# Altium PCB PCB3.PcbDoc (part 2 of 2)
Units mm, origin at the board's own origin, x right, y up, seen from the top; angles counter-clockwise.
Board outline 110 x 86 mm, 4 copper layers (Top Layer, Signal Layer 1, Signal Layer 2, Bottom Layer), stack 1.466 mm thick; 201 components, 102 nets, 1236 pads, 354 vias.
Unrouted connection lines stored in the file: 1.
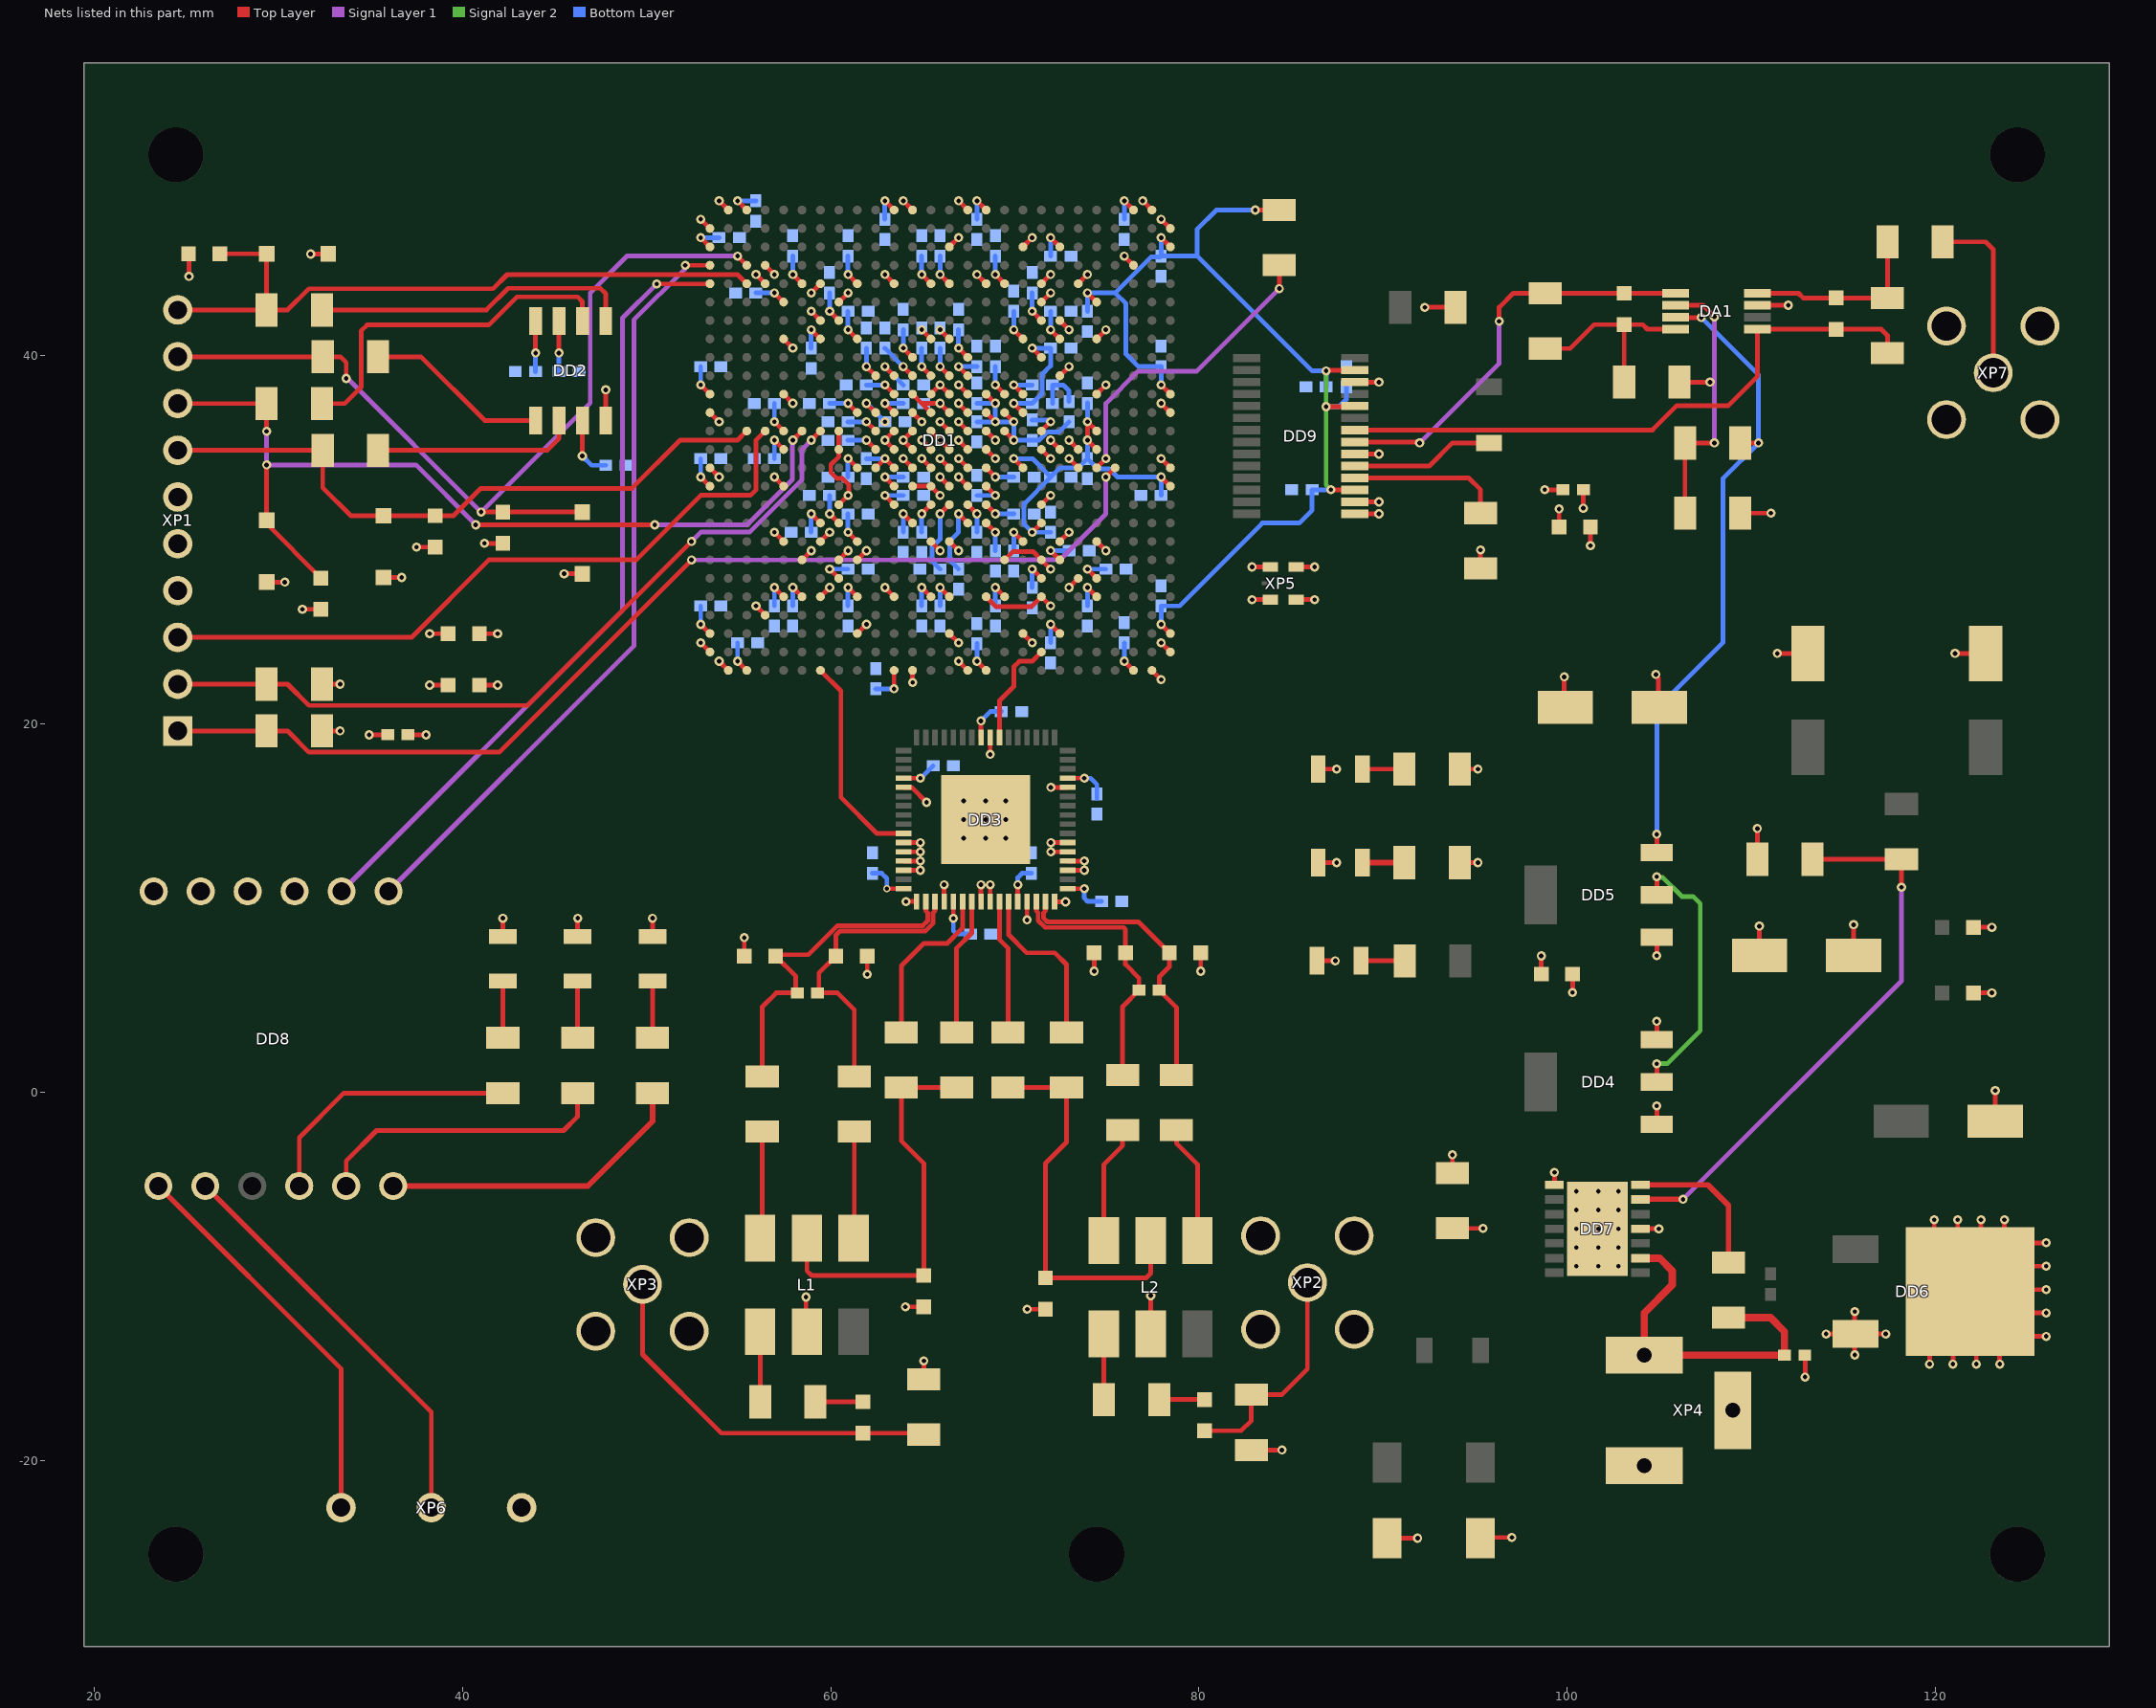
[diagram p4: the nets of this part, all layers, seen from the top]

## Via types
v1: diameter 0.5, hole 0.25, Top Layer to Bottom Layer, 352 vias
v2: diameter 0.4, hole 0.25, Top Layer to Bottom Layer, 2 vias

## Nets (pads, with @x,y where several pads share a name; then routed paths per layer and width w, separated by ;. In a path a pad name is that pad's centre, name@x,y a point inside that pad or via, vN(x,y) a via of type N, cw(c..) or ccw(c..) an arc to the next point about the centre after c; other vN are vias at no path point) (continued)
GND: C1.2 C2.2 C3.2 C4.2 C5.2 C6.2 C7.2 C8.2 C9.2 C10.2 C11.2 C12.2 C13.2 C14.2 C15.2 C16.2 C17.2 C18.2 C19.2 C20.2 C21.2 C22.2 C23.2 C24.2 C25.2 C26.2 C27.2 C28.2 C29.2 C30.2 C31.2 C32.2 C33.2 C34.2 C35.2 C36.2 C37.2 C38.2 C39.2 C40.2 C41.2 C42.2 C43.2 C44.2 C45.2 C46.2 C47.2 C48.2 C49.2 C50.2 C51.2 C52.2 C53.2 C54.2 C55.2 C56.2 C57.2 C58.2 C59.2 C60.2 C61.2 C62.2 C63.2 C64.2 C65.2 C66.2 C67.2 C68.2 C69.2 C70.2 C71.2 C72.2 C73.2 C74.2 C75.2 C76.2 C77.2 C78.2 C79.2 C80.2 C81.2 C82.2 C83.2 C84.2 C85.2 C86.2 C87.2 C88.2 C89.2 C90.2 C91.2 C92.2 C93.2 C94.2 C95.2 C96.2 C99.2 C100.2 C101.2 C102.2 C103.2 C104.2 C105.2 C106.2 C107.2 C108.1 C109.2 C110.1 C111.2 C114.2 C115.2 C116.2 C118.2 C119.2 C120.2 C121.2 C122.2 C123.2 C125.2 C126.2 C127.2 C128.2 C130.2 C135.2 DA1.7 DD1.A2 DD1.A12 DD1.A15 DD1.A25 DD1.AA21 DD1.AB7 DD1.AB11 DD1.AB16 DD1.AB19 DD1.AC4 DD1.AD9 DD1.AD14 DD1.AD18 DD1.AE1 DD1.AE26 DD1.AF2 DD1.AF12 DD1.AF15 DD1.AF25 DD1.B1 DD1.B26 DD1.C14 DD1.C18 DD1.D4 DD1.D24 DD1.E4 DD1.E7 DD1.E11 DD1.E16 DD1.E19 DD1.E21 DD1.F8 DD1.F19 DD1.G7 DD1.G20 DD1.H5 DD1.H13 DD1.H14 DD1.H22 DD1.K20 DD1.L5 DD1.L12 DD1.L13 DD1.L14 DD1.L15 DD1.L22 DD1.M1 DD1.M12 DD1.M13 DD1.M14 DD1.M15 DD1.M26 DD1.N8 DD1.N11 DD1.N12 DD1.N13 DD1.N14 DD1.N15 DD1.N16 DD1.N19 DD1.P8 DD1.P11 DD1.P12 DD1.P13 DD1.P14 DD1.P15 DD1.P16 DD1.P19 DD1.P20 DD1.P21 DD1.R1 DD1.R12 DD1.R13 DD1.R14 DD1.R15 DD1.R21 DD1.R26 DD1.T5 DD1.T12 DD1.T13 DD1.T14 DD1.T15 DD1.U8 DD1.U19 DD1.W5 DD1.W7 DD1.W13 DD1.W14 DD1.W20 DD1.W22 DD1.Y6 DD1.Y8 DD1.Y9 DD1.Y17 DD1.Y19 DD2.4 DD3.1 DD3.4 DD3.13 DD3.16 DD3.21 DD3.22 DD3.28 DD3.40 DD3.53 DD3.59 DD3.60 DD3.61 DD3.62 DD3.65 DD4.1 DD5.1 DD6.4 DD7.4 DD7.8 DD8.8 DD9.15 DD9.16 DD9.20 DD9.26 HL1.2 HL2.2 HL3.2 HL4.2 HL5.2 HL6.2 L1.2 L2.2 R8.1 R9.1 R20.1 R21.1 R25.1 R31.1 R33.1 R36.1 VD10.2 VD11.2 XP1.4 XP1.5 XP2.2 XP3.2 XP4.2 XP4.3 XP5.2 XP6.GND XP7.2 | length 173.5
  Top Layer w0.254: C90.2@25.128,45.529 25.153,45.505 v1(25.153,44.301) ; v1(31.314,26.225) C93.2@32.315,26.225 ; v1(34.94,19.408) C135.2@35.94,19.408 ; v1(37.512,29.605) C95.2@38.512,29.605 ; v1(38.225,22.111) C119.2@39.225,22.111 ; v1(38.225,24.905) C123.2@39.225,24.905 ; v1(41.195,29.809) C92.2@42.195,29.809 ; HL5.2@42.196,8.448 v1(42.196,9.449) ; HL4.2@46.26,8.448 v1(46.26,9.449) ; DD2.4@47.783,36.479 v1(47.783,38.145) ; HL3.2@50.324,8.448 v1(50.324,9.449) ; v1(52.94,24.408) DD1.AE1@53.44,23.908 ; v1(52.94,47.408) DD1.B1@53.44,46.908 ; DD1.R1@53.44,33.908 v1(53.94,33.408) ; DD1.M1@53.44,36.908 v1(53.94,36.408) ; v1(53.94,23.408) DD1.AF2@54.44,22.908 ; v1(53.94,48.408) DD1.A2@54.44,47.908 ; C108.1@55.305,7.395 v1(55.305,8.395) ; v1(55.94,26.408) DD1.AC4@56.44,25.908 ; v1(55.94,44.408) DD1.E4@56.44,43.908 ; DD1.D4@56.44,44.908 v1(56.94,44.408) ; v1(56.94,30.408) DD1.W5@57.44,29.908 ; v1(56.94,33.408) DD1.T5@57.44,32.908 ; DD1.L5@57.44,37.908 v1(57.94,37.408) ; DD1.H5@57.44,40.908 v1(57.94,40.408) ; DD1.Y6@58.44,28.908 v1(58.94,29.408) ; v1(58.656,-11.122) 58.656,-12.951 L1.2@58.706,-13.002 ; v1(58.94,42.408) DD1.G7@59.44,41.908 ; v1(58.94,43.408) DD1.E7@59.44,43.908 ; DD1.AB7@59.44,26.908 v1(59.94,27.408) ; DD1.W7@59.44,29.908 v1(59.94,30.408) ; DD1.Y8@60.44,28.908 v1(60.94,29.408) ; DD1.U8@60.44,31.908 v1(60.94,32.408) 60.985,32.453 60.985,32.972 60.619,33.339 60.321,33.339 60.01,33.65 60.01,34.087 60.44,34.517 DD1.P8@60.44,34.908 DD1.N8@60.44,35.908 ; DD1.F8@60.44,42.908 v1(60.94,43.408) ; DD1.AD9@61.44,24.908 v1(61.94,25.408) ; DD1.Y9@61.44,28.908 v1(61.94,29.408) ; v1(61.982,6.4) C106.2@61.982,7.4 ; v1(62.94,27.408) DD1.AB11@63.44,26.908 ; v1(62.94,44.408) DD1.E11@63.44,43.908 ; DD1.P11@63.44,34.908 v1(62.94,35.408) DD1.N11@63.44,35.908 ; v1(63.94,34.408) DD1.R12@64.44,33.908 ; v1(63.94,48.408) DD1.A12@64.44,47.908 ; DD3.62@63.96,12.056 v1(64.871,12.056) ; DD3.61@63.96,12.556 v1(64.871,12.556) ; DD3.60@63.96,13.056 v1(64.871,13.056) ; DD3.59@63.96,13.556 v1(64.871,13.556) ; DD3.53@63.96,16.556 64.396,16.556 v1(65.209,15.744) ; v1(64.056,-11.654) C110.1@65.056,-11.654 ; v1(64.091,10.356) DD3.1@64.66,10.356 ; DD1.AF12@64.44,22.908 64.444,22.904 64.444,22.257 v1(64.448,22.254) ; DD1.T12@64.44,32.908 DD1.T13@65.44,32.908 v1(65.94,32.408) ; DD1.P12@64.44,34.908 v1(63.94,35.408) DD1.N12@64.44,35.908 ; DD1.M12@64.44,36.908 v1(64.94,36.408) ; DD1.L12@64.44,37.908 64.94,37.408 ; v1(64.94,34.408) DD1.R13@65.44,33.908 ; v1(64.94,35.408) DD1.P13@65.44,34.908 ; v1(64.94,41.408) DD1.H13@65.44,40.908 ; R8.1@65.056,-15.59 v1(65.056,-14.589) ; DD1.W13@65.44,29.908 v1(65.94,29.408) ; DD1.N13@65.44,35.908 v1(65.94,35.408) DD1.P14@66.44,34.908 ; DD1.M13@65.44,36.908 64.94,37.408 ; DD1.L13@65.44,37.908 v1(65.94,38.408) DD1.L14@66.44,37.908 ; v1(65.94,33.408) DD1.T14@66.44,32.908 ; v1(65.94,34.408) DD1.R14@66.44,33.908 ; v1(65.94,36.408) DD1.N14@66.44,35.908 ; v1(65.94,41.408) DD1.H14@66.44,40.908 ; DD3.4@66.16,10.356 v1(66.16,11.267) ; DD1.AD14@66.44,24.908 v1(66.94,24.408) ; DD1.W14@66.44,29.908 v1(66.94,29.408) ; DD1.M14@66.44,36.908 v1(65.94,37.408) 64.94,37.408 ; DD1.C14@66.44,45.908 v1(66.94,46.408) ; v1(66.94,23.408) DD1.AF15@67.44,22.908 ; v1(66.94,33.408) DD1.T15@67.44,32.908 ; v1(66.94,34.408) DD1.R15@67.44,33.908 ; v1(66.94,35.408) DD1.P15@67.44,34.908 ; v1(66.94,36.408) DD1.N15@67.44,35.908 ; v1(66.94,37.408) DD1.M15@67.44,36.908 ; v1(66.94,38.408) DD1.L15@67.44,37.908 ; v1(66.94,48.408) DD1.A15@67.44,47.908 ; v1(67.94,44.408) DD1.E16@68.44,43.908 ; DD1.AB16@68.44,26.908 68.98,26.368 70.9,26.368 DD1.AB19@71.44,26.908 v1(71.94,26.408) ; DD1.P16@68.44,34.908 v1(68.94,34.408) ; DD1.N16@68.44,35.908 v1(68.94,35.408) ; v1(68.66,18.346) DD3.40@68.66,19.256 ; DD1.Y17@69.44,28.908 69.898,29.366 70.983,29.366 DD1.Y19@71.44,28.908 v1(71.94,28.408) ; DD1.AD18@70.44,24.908 v1(70.94,24.408) ; DD1.C18@70.44,45.908 v1(70.94,46.408) ; v1(70.66,9.356) DD3.13@70.66,10.356 ; v1(70.67,-11.781) C111.2@71.66,-11.781 ; DD1.U19@71.44,31.908 v1(71.94,32.408) ; DD1.P19@71.44,34.908 v1(71.94,34.408) ; DD1.N19@71.44,35.908 v1(71.94,36.408) ; DD1.F19@71.44,42.908 v1(71.94,43.408) ; DD1.E19@71.44,43.908 v1(71.94,44.408) ; v1(71.94,35.408) DD1.P20@72.44,34.908 ; v1(71.95,13.056) DD3.21@72.86,13.056 ; v1(71.95,13.556) DD3.22@72.86,13.556 ; v1(71.95,16.556) DD3.28@72.86,16.556 ; DD3.16@72.16,10.356 72.176,10.341 v1(72.753,10.341) ; DD1.W20@72.44,29.908 v1(72.94,30.408) ; DD1.K20@72.44,38.908 v1(72.94,39.408) ; DD1.G20@72.44,41.908 v1(72.94,41.408) ; v1(72.94,27.408) DD1.AA21@73.44,27.908 ; v1(72.94,34.408) DD1.R21@73.44,33.908 ; v1(72.94,35.408) DD1.P21@73.44,34.908 ; DD1.E21@73.44,43.908 v1(73.94,44.408) ; v1(74.304,6.572) C109.2@74.304,7.572 ; DD1.W22@74.44,29.908 v1(74.94,29.408) ; DD1.L22@74.44,37.908 v1(74.94,38.408) ; DD1.H22@74.44,40.908 v1(74.94,41.408) ; v1(75.94,45.408) DD1.D24@76.44,44.908 ; v1(76.94,48.408) DD1.A25@77.44,47.908 ; L2.2@77.375,-13.129 v1(77.375,-11.046) ; DD1.AF25@77.44,22.908 v1(77.94,22.408) ; v1(77.94,24.408) DD1.AE26@78.44,23.908 ; v1(77.94,34.408) DD1.R26@78.44,33.908 ; v1(77.94,37.408) DD1.M26@78.44,36.908 ; v1(77.94,47.408) DD1.B26@78.44,46.908 ; v1(80.091,6.572) C107.2@80.091,7.572 ; R9.1@82.836,-19.431 v1(84.502,-19.431) ; v1(82.877,26.749) XP5.2@83.878,26.749 ; v1(82.877,28.527) XP5.2@83.878,28.527 ; XP5.2@85.275,26.749 v1(86.276,26.749) ; XP5.2@85.275,28.527 v1(86.276,28.527) ; HL6.2@86.398,7.136 v1(87.399,7.136) ; HL2.2@86.468,12.47 v1(87.469,12.47) ; HL1.2@86.468,17.55 v1(87.469,17.55) ; DD9.15@88.458,31.41 v1(89.771,31.41) ; DD9.16@88.458,32.06 v1(89.771,32.06) ; DD9.20@88.458,34.66 v1(89.771,34.66) ; DD9.26@88.458,38.56 v1(89.771,38.56) ; VD11.2@90.202,-24.214 v1(91.868,-24.214) ; v1(92.259,42.624) R20.1@93.924,42.624 ; R21.1@93.758,-7.39 v1(95.424,-7.39) ; VD10.2@95.282,-24.214 95.318,-24.178 v1(96.984,-24.178) ; R31.1@95.282,28.448 v1(95.282,29.449) ; DD7.8@99.296,-5.026 99.296,-4.353 v1(99.299,-4.35) ; v1(100.282,5.414) C115.2@100.282,6.414 ; v1(100.864,31.718) C26.2@100.864,32.718 ; v1(101.252,29.686) C120.2@101.252,30.686 ; DD7.4@103.969,-7.414 v1(104.97,-7.414) ; v1(104.807,22.685) 104.807,22.619 104.944,22.482 C118.2@104.944,21.288 ; DD4.1@104.854,-1.742 v1(104.854,-0.741) ; v1(104.854,7.418) DD5.1@104.854,8.418 ; R36.1@106.084,38.56 v1(107.75,38.56) ; R33.1@109.386,31.448 v1(111.052,31.448) ; R25.1@110.316,12.652 v1(110.316,14.318) ; DA1.7@110.328,42.736 v1(111.994,42.736) ; v1(111.397,23.828) C125.2@113.062,23.828 ; C122.2@112.892,-14.272 112.91,-14.289 v1(112.91,-15.465) ; C121.2@115.542,7.43 v1(115.542,9.096) ; v1(119.666,-14.764) DD6.4@119.666,-13.764 ; DD6.4@119.92,-7.922 v1(119.92,-6.921) ; v1(120.936,-14.764) DD6.4@120.936,-13.764 ; v1(121.049,23.828) C126.2@122.714,23.828 ; DD6.4@121.19,-7.922 v1(121.19,-6.921) ; C116.2@122.048,5.398 v1(123.049,5.398) ; C127.2@122.048,8.954 v1(123.049,8.954) ; v1(122.206,-14.764) DD6.4@122.206,-13.764 ; DD6.4@122.46,-7.922 v1(122.46,-6.921) ; C114.2@123.232,-1.572 v1(123.232,0.094) ; v1(123.476,-14.764) DD6.4@123.476,-13.764 ; DD6.4@123.73,-7.922 v1(123.73,-6.921) ; DD6.4@125,-13.256 v1(126.001,-13.256) ; DD6.4@125,-11.986 v1(126.001,-11.986) ; DD6.4@125,-10.716 v1(126.001,-10.716) ; DD6.4@125,-9.446 v1(126.001,-9.446) ; DD6.4@125,-8.176 v1(126.001,-8.176)
  Signal Layer 1 w0.256: v1@37.497,29.62 v1(37.512,29.605)
  Bottom Layer w0.254: C21.2@70.94,36.508 71.774,36.508 71.874,36.408 v1(71.94,36.408)
  Bottom Layer w0.256: C83.2@72.04,37.408 C19.2@72.04,38.408 72.622,38.408 72.94,38.09 C30.2@72.94,37.508
  other v1: 100.489,-9.446 101.683,-9.446 102.775,-9.446 100.489,-8.43 101.683,-8.43 102.775,-8.43 100.489,-7.414 101.683,-7.414 102.775,-7.414 100.489,-6.398 101.683,-6.398 102.775,-6.398 100.489,-5.382 101.683,-5.382 102.775,-5.382 67.217,13.79 68.41,13.79 69.503,13.79 67.217,14.806 68.41,14.806 69.503,14.806 67.217,15.822 68.41,15.822 69.503,15.822
MIXA1_N: L1.6 R12.1 | length 6.3
  Top Layer w0.254: L1.6@56.202,-8.434 56.202,-7.494 56.282,-7.414 R12.1@56.282,-2.14
MIXA1_P: L1.4 R13.1 | length 6.3
  Top Layer w0.254: L1.4@61.282,-8.434 R13.1@61.282,-2.14
MIXA_N: C108.2 C112.1 DD3.2 R12.2 | length 18.6
  Top Layer w0.254: R12.2@56.282,0.86 56.282,4.64 57.042,5.4 C112.1@58.182,5.4 58.107,5.475 58.107,6.292 C108.2@57.005,7.395 57.08,7.47 58.789,7.47 60.365,9.046 65.006,9.046 65.26,9.3 65.26,9.756 65.16,9.856 DD3.2@65.16,10.356
MIXA_P: C106.1 C112.2 DD3.3 R13.2 | length 16.3
  Top Layer w0.254: R13.2@61.282,0.86 61.282,4.488 60.37,5.4 C112.2@59.282,5.4 59.357,5.475 59.357,6.475 C106.1@60.282,7.4 60.282,8.539 60.489,8.746 65.131,8.746 65.56,9.175 65.56,9.756 65.66,9.856 DD3.3@65.66,10.356
MIXB1_N: L2.6 R15.1 | length 6.4
  Top Layer w0.254: L2.6@74.835,-8.049 74.835,-3.91 75.851,-2.894 R15.1@75.851,-2.056
MIXB1_P: L2.4 R14.1 | length 6.5
  Top Layer w0.254: R14.1@78.772,-2.056 78.772,-2.767 79.915,-3.91 L2.4@79.915,-8.049
MIXB_N: C109.1 C113.1 DD3.14 R15.2 | length 14.6
  Top Layer w0.254: DD3.14@71.16,10.356 71.16,9.856 71.26,9.756 71.26,9.328 71.639,8.949 75.902,8.949 76.004,8.847 C109.1@76.004,7.572 76.005,7.571 76.005,6.94 76.74,6.205 C113.1@76.74,5.54 75.851,4.651 R15.2@75.851,0.944
MIXB_P: C107.1 C113.2 DD3.15 R14.2 | length 15.8
  Top Layer w0.254: DD3.15@71.66,10.356 71.66,9.856 71.56,9.756 71.56,9.452 71.764,9.249 76.715,9.249 C107.1@78.391,7.572 78.391,6.813 77.84,6.262 C113.2@77.84,5.54 78.772,4.608 R14.2@78.772,0.944
NetC90_1: C90.1 DD1.E3 R7.2 VD4.2 XP1.10 | length 37.5
  Top Layer w0.254: XP1.10@24.542,42.481 R7.2@29.368,42.481 ; C90.1@26.828,45.529 VD4.2@29.368,45.529 R7.2@29.368,42.481 ; DD1.E3@55.44,43.908 54.946,44.402 42.434,44.402 41.667,43.635 31.663,43.635 30.509,42.481 R7.2@29.368,42.481
NetC92_1: C92.1 DD1.D3 R4.2 VD3.2 XP1.9 | length 49.9
  Top Layer w0.254: XP1.9@24.542,39.941 R4.2@32.416,39.941 33.373,39.941 33.687,39.627 v1(33.687,38.764) ; v1(41.019,31.509) C92.1@42.195,31.509 VD3.2@46.513,31.509 ; v1(54.94,45.408) DD1.D3@55.44,44.908
  Signal Layer 1 w0.254: v1(33.687,38.764) 33.764,38.764 v1(41.019,31.509) 46.94,37.43 46.94,43.408 48.944,45.412 52.309,45.412 52.313,45.408 v1(54.94,45.408)
NetC93_1: C93.1 DD1.N6 R2.2 VD2.2 XP1.8 | length 49.3
  Top Layer w0.254: XP1.8@24.542,37.401 R2.2@29.368,37.401 v1(29.368,35.892) ; v1(29.368,34.064) VD2.2@29.368,31.051 29.368,30.872 C93.1@32.315,27.925 ; v1(40.723,30.813) v1(50.451,30.813) ; v1(57.94,35.408) DD1.N6@58.44,35.908
  Signal Layer 1 w0.254: v1(29.368,35.892) v1(29.368,34.064) 37.473,34.064 v1(40.723,30.813) ; v1(50.451,30.813) 55.455,30.813 57.919,33.277 57.919,35.387 v1(57.94,35.408)
NetC95_1: C95.1 DD1.N3 R1.2 VD1.2 XP1.7 | length 35.5
  Top Layer w0.254: XP1.7@24.542,34.861 R1.2@32.416,34.861 32.416,32.829 33.94,31.305 VD1.2@35.718,31.305 C95.1@38.512,31.305 39.513,31.305 41.003,32.795 49.207,32.795 51.823,35.411 54.943,35.411 DD1.N3@55.44,35.908
NetC97_1: C97.1 R8.2 XP3.1 | length 20.9
  Top Layer w0.254: XP3.1@49.782,-10.434 49.782,-14.238 54.056,-18.512 C97.1@61.754,-18.512 64.978,-18.512 R8.2@65.056,-18.59
NetC97_2: C97.2 R10.1 | length 2.6
  Top Layer w0.254: R10.1@59.166,-16.812 C97.2@61.754,-16.812
NetC98_1: C98.1 R9.2 XP2.1 | length 12.5
  Top Layer w0.254: C98.1@80.296,-18.385 82.279,-18.385 82.836,-17.828 R9.2@82.836,-16.431 84.487,-16.431 85.884,-15.034 XP2.1@85.884,-10.335
NetC98_2: C98.2 R11.1 | length 2.5
  Top Layer w0.254: R11.1@77.835,-16.685 C98.2@80.296,-16.685
NetC110_2: C110.2 L1.5 R16.1 R18.1 | length 21.7
  Top Layer w0.254: L1.5@58.706,-8.176 58.706,-9.7 58.96,-9.954 C110.2@65.056,-9.954 65.056,-3.858 63.834,-2.636 R18.1@63.834,0.254 R16.1@66.834,0.254
NetC111_1: C111.1 L2.5 R17.1 R19.1 | length 21.6
  Top Layer w0.254: R17.1@69.628,0.254 R19.1@72.803,0.254 72.803,-2.715 71.66,-3.858 C111.1@71.66,-10.081 77.121,-10.081 77.375,-9.827 L2.5@77.375,-8.049
NetC122_1: C122.1 DD7.2 R22.1 XP4.1 | length 19.5
  Top Layer w0.4: DD7.2@103.969,-9.014 105.011,-9.014 105.696,-9.7 105.696,-10.462 104.172,-11.986 XP4.1@104.172,-14.272 C122.1@111.792,-14.272 111.792,-13.002 111.03,-12.24 R22.1@108.744,-12.24
NetC129_2: C129.2 DD9.19 | length 7.8
  Top Layer w0.254: DD9.19@88.458,34.01 92.51,34.01 93.758,35.258 C129.2@95.75,35.258
NetC131_1: C131.1 DA1.1 DD9.21 R34.1 | length 22.6
  Top Layer w0.254: DD9.21@88.458,35.31 91.928,35.31 v1(91.98,35.258) ; v1(96.298,41.862) 96.298,42.624 97.06,43.386 R34.1@98.79,43.386 C131.1@103.084,43.386 DA1.1@105.878,43.386
  Signal Layer 1 w0.254: v1(91.98,35.258) 96.298,39.576 v1(96.298,41.862)
NetC131_2: C131.2 C132.2 DA1.4 DA1.8 R34.2 R35.2 R36.2 R37.1 | length 21.1
  Top Layer w0.254: R34.2@98.79,40.386 100.156,40.386 101.456,41.686 C131.2@103.084,41.686 ; R36.2@103.084,38.56 C131.2@103.084,41.686 ; DA1.4@105.878,41.436 104.344,41.436 104.094,41.686 C131.2@103.084,41.686 ; DA1.8@110.328,43.386 112.554,43.386 112.808,43.132 C132.2@114.586,43.132 R35.2@117.38,43.132 R37.1@117.38,46.18
NetC132_1: C132.1 DA1.5 DD9.22 R35.1 | length 33.8
  Top Layer w0.254: DD9.22@88.458,35.96 88.458,35.962 104.622,35.962 105.95,37.29 108.744,37.29 110.328,38.874 DA1.5@110.328,41.436 114.582,41.436 C132.1@114.586,41.432 117.048,41.432 117.38,41.1 R35.1@117.38,40.132
NetDA1_2: DA1.2 R32.1 R33.2 | length 14.6
  Top Layer w0.254: DA1.2@105.878,42.736 107.362,42.736 v1(107.982,42.116) ; R33.2@106.386,31.448 R32.1@106.386,35.258 v1(107.982,35.258)
  Signal Layer 1 w0.254: v1(107.982,35.258) v1(107.982,42.116)
NetDD1_N4: DD1.N4 XP1.3 | length 38.1
  Top Layer w0.254: XP1.3@24.542,24.701 37.233,24.701 41.44,28.908 49.44,28.908 52.946,32.414 55.645,32.414 55.934,32.704 55.934,35.402 DD1.N4@56.44,35.908
NetDD1_N7: DD1.N7 R3.1 XP1.2 | length 42.5
  Top Layer w0.254: XP1.2@24.542,22.161 R3.1@29.368,22.161 30.509,22.161 31.663,21.007 43.539,21.007 v1(52.44,29.908) ; v1(58.94,35.408) DD1.N7@59.44,35.908
  Signal Layer 1 w0.254: v1(52.44,29.908) 52.964,30.432 55.613,30.432 58.444,33.264 58.444,34.912 v1(58.94,35.408)
NetDD1_R22: DD1.R22 R6.1 | length 17
  Top Layer w0.254: DD1.R22@74.44,33.908 v1(74.94,34.408) ; v1(84.36,43.64) R6.1@84.36,44.91
  Signal Layer 1 w0.254: v1(74.94,34.408) 74.94,37.408 76.69,39.158 79.878,39.158 v1(84.36,43.64)
NetDD1_R23: DD1.R23 R5.1 XP1.1 | length 59
  Top Layer w0.254: XP1.1@24.542,19.621 R5.1@29.368,19.621 30.509,19.621 31.663,18.467 41.999,18.467 v1(52.44,28.908) ; v1(74.94,33.408) DD1.R23@75.44,33.908
  Signal Layer 1 w0.254: v1(52.44,28.908) 52.444,28.904 59.724,28.904 59.732,28.912 60.724,28.912 60.732,28.904 70.724,28.904 70.732,28.912 71.149,28.912 71.732,28.912 72.149,28.912 72.153,28.908 72.44,28.908 74.94,31.408 v1(74.94,33.408)
NetDD2_1: DD2.1 R4.1 | length 10
  Top Layer w0.254: R4.1@35.416,39.941 37.75,39.941 41.212,36.479 DD2.1@43.973,36.479
NetDD2_2: DD2.2 R1.1 | length 11.1
  Top Layer w0.254: R1.1@35.416,34.861 44.608,34.861 45.243,35.496 DD2.2@45.243,36.479
NetDD2_5: DD2.5 R7.1 | length 17.5
  Top Layer w0.254: R7.1@32.368,42.481 41.306,42.481 42.483,43.658 47.495,43.658 47.783,43.37 DD2.5@47.783,41.879
NetDD2_6: DD2.6 R2.1 | length 19.5
  Top Layer w0.254: R2.1@32.368,37.401 33.61,37.401 34.5,38.291 34.5,41.339 34.829,41.669 41.433,41.669 42.957,43.193 46.259,43.193 46.513,42.939 DD2.6@46.513,41.879
NetDD3_6: DD3.6 R18.2 | length 9.2
  Top Layer w0.254: R18.2@63.834,3.254 63.834,5.794 63.834,6.858 65.056,8.08 66.326,8.08 67.16,8.914 DD3.6@67.16,10.356
NetDD3_7: DD3.7 R16.2 | length 7.4
  Top Layer w0.254: R16.2@66.834,3.254 66.834,7.826 67.66,8.652 DD3.7@67.66,10.356
NetDD3_10: DD3.10 R17.2 | length 7.3
  Top Layer w0.254: DD3.10@69.16,10.356 69.16,8.294 69.628,7.826 R17.2@69.628,3.254
NetDD3_11: DD3.11 R19.2 | length 9.3
  Top Layer w0.254: DD3.11@69.66,10.356 69.66,8.556 70.644,7.572 72.168,7.572 72.803,6.937 72.803,5.794 R19.2@72.803,3.254
NetDD7_6: DD7.6 R25.2 R26.1 | length 30.3
  Top Layer w0.254: R25.2@113.316,12.652 R26.1@118.142,12.652 ; v1(118.142,11.128) R26.1@118.142,12.398
  Top Layer w0.3: DD7.6@103.969,-5.813 v1(106.281,-5.813)
  Signal Layer 1 w0.254: v1(106.281,-5.813) 118.142,6.048 v1(118.142,11.128)
NetDD7_7: DD7.7 R22.2 | length 8.3
  Top Layer w0.3: DD7.7@103.969,-5.026 107.627,-5.026 108.744,-6.144 R22.2@108.744,-9.24
NetDD8_1: DD8.1 R27.2 | length 17.1
  Top Layer w0.3: DD8.1@36.24,-5.092 46.804,-5.092 50.324,-1.572 R27.2@50.324,-0.048
NetDD8_2: DD8.2 R28.2 | length 16.2
  Top Layer w0.254: DD8.2@33.69,-5.092 33.69,-3.728 35.338,-2.08 45.498,-2.08 46.26,-1.318 R28.2@46.26,-0.048
NetDD8_3: DD8.3 R29.2 | length 14.7
  Top Layer w0.254: DD8.3@31.14,-5.092 31.14,-2.468 33.56,-0.048 R29.2@42.196,-0.048
NetDD8_5: DD8.5 XP6.2 | length 22.5
  Top Layer w0.254: DD8.5@26.04,-5.092 38.312,-17.364 XP6.2@38.312,-22.555
NetDD8_6: DD8.6 XP6.1 | length 21.6
  Top Layer w0.254: DD8.6@23.49,-5.092 33.412,-15.014 XP6.1@33.412,-22.555
NetDD9_18: DD9.18 R31.2 | length 8.4
  Top Layer w0.254: DD9.18@88.458,33.36 94.64,33.36 95.282,32.718 R31.2@95.282,31.448
NetHL1_1: HL1.1 R24.1 | length 2.3
  Top Layer w0.254: HL1.1@88.868,17.55 R24.1@91.154,17.55
NetHL2_1: HL2.1 R23.1 | length 2.3
  Top Layer w0.3: HL2.1@88.868,12.47 R23.1@91.154,12.47
NetHL3_1: HL3.1 R27.1 | length 3.1
  Top Layer w0.254: R27.1@50.324,2.952 HL3.1@50.324,6.048
NetHL4_1: HL4.1 R28.1 | length 3.1
  Top Layer w0.254: R28.1@46.26,2.952 HL4.1@46.26,6.048
NetHL5_1: HL5.1 R29.1 | length 3.1
  Top Layer w0.254: R29.1@42.196,2.952 HL5.1@42.196,6.048
NetHL6_1: HL6.1 R30.1 | length 2.4
  Top Layer w0.254: HL6.1@88.798,7.136 R30.1@91.178,7.136
NetL1_1: L1.1 R10.2 | length 3.6
  Top Layer w0.254: R10.2@56.166,-16.812 L1.1@56.166,-13.256
NetL2_1: L2.1 R11.2 | length 3.6
  Top Layer w0.254: R11.2@74.835,-16.685 L2.1@74.835,-13.129
NetR37_2: R37.2 XP7.1 | length 9.6
  Top Layer w0.254: R37.2@120.38,46.18 122.714,46.18 123.126,45.768 XP7.1@123.126,39.068
OVF_ADC_A: DD1.AF7 DD3.58 | length 11.6
  Top Layer w0.254: DD1.AF7@59.44,22.908 60.553,21.795 60.553,16.012 62.509,14.056 DD3.58@63.96,14.056
OVF_ADC_B: DD1.AE19 DD3.39 | length 6
  Top Layer w0.254: DD3.39@69.16,19.256 69.16,21.252 69.946,22.038 69.946,23.113 70.236,23.402 70.934,23.402 DD1.AE19@71.44,23.908
UART_RXD: DD1.D1 DD8.12 | length 42
  Top Layer w0.254: v1(52.1,44.908) DD1.D1@53.44,44.908
  Signal Layer 1 w0.254: DD8.12@35.99,10.908 49.308,24.226 49.308,41.942 52.1,44.734 v1(52.1,44.908)
UART_TXD: DD1.E1 DD8.11 | length 43
  Top Layer w0.254: v1(50.548,43.894) 53.426,43.894 DD1.E1@53.44,43.908
  Signal Layer 1 w0.254: DD8.11@33.44,10.908 48.69,26.158 48.69,42.037 v1(50.548,43.894)
VCC12: C1.1 C2.1 C3.1 C4.1 C5.1 C6.1 C7.1 C8.1 C9.1 C10.1 C11.1 C12.1 C13.1 C14.1 C15.1 C16.1 C17.1 C18.1 C19.1 C20.1 C21.1 C22.1 C23.1 C24.1 C25.1 C26.1 C27.1 C28.1 C29.1 C30.1 C31.1 C32.1 C33.1 C34.1 C35.1 C36.1 C118.1 C120.1 DD1.AA8 DD1.AA19 DD1.G8 DD1.G19 DD1.H7 DD1.H20 DD1.K10 DD1.K11 DD1.K12 DD1.K13 DD1.K14 DD1.K15 DD1.L11 DD1.L16 DD1.L17 DD1.L18 DD1.M10 DD1.M11 DD1.M16 DD1.M17 DD1.N10 DD1.N17 DD1.P10 DD1.R10 DD1.R11 DD1.R16 DD1.T11 DD1.T16 DD1.U11 DD1.U13 DD1.U14 DD1.U15 DD1.U16 DD1.V7 DD1.V16 DD1.Y20 DD4.2 DD5.2 R21.2 R24.2 | length 89.1
  Top Layer w0.254: v1(58.94,31.408) DD1.V7@59.44,30.908 ; v1(58.94,41.408) DD1.H7@59.44,40.908 ; v1(59.94,28.408) DD1.AA8@60.44,27.908 ; v1(59.94,42.408) DD1.G8@60.44,41.908 ; v1(61.94,35.408) DD1.P10@62.44,34.908 ; v1(61.94,36.408) DD1.N10@62.44,35.908 ; v1(61.94,37.408) DD1.M10@62.44,36.908 ; v1(61.94,39.408) DD1.K10@62.44,38.908 ; DD1.R10@62.44,33.908 v1(62.94,34.408) DD1.R11@63.44,33.908 ; v1(62.94,32.408) DD1.U11@63.44,31.908 ; v1(62.94,33.408) DD1.T11@63.44,32.908 ; v1(62.94,37.408) DD1.M11@63.44,36.908 ; v1(62.94,38.408) DD1.L11@63.44,37.908 ; v1(62.94,39.408) DD1.K11@63.44,38.908 ; v1(63.94,39.408) DD1.K12@64.44,38.908 ; v1(64.94,31.408) DD1.U13@65.44,31.908 ; v1(64.94,39.408) DD1.K13@65.44,38.908 ; v1(65.94,31.408) DD1.U14@66.44,31.908 ; v1(65.94,39.408) DD1.K14@66.44,38.908 ; v1(66.94,39.408) DD1.K15@67.44,38.908 ; DD1.U15@67.44,31.908 v1(67.94,31.408) ; DD1.V16@68.44,30.908 v1(68.94,30.408) ; DD1.U16@68.44,31.908 v1(68.94,31.408) ; DD1.T16@68.44,32.908 v1(68.94,32.408) ; DD1.R16@68.44,33.908 v1(68.94,33.408) ; DD1.M16@68.44,36.908 v1(68.94,36.408) ; DD1.L16@68.44,37.908 v1(68.94,37.408) ; v1(68.94,38.408) DD1.L17@69.44,37.908 ; DD1.N17@69.44,35.908 v1(69.94,35.408) ; DD1.M17@69.44,36.908 v1(69.94,36.408) ; v1(69.94,38.408) DD1.L18@70.44,37.908 ; v1(70.94,28.408) DD1.AA19@71.44,27.908 ; v1(70.94,42.408) DD1.G19@71.44,41.908 ; v1(71.94,29.416) 71.94,29.408 DD1.Y20@72.44,28.908 ; v1(71.94,41.408) DD1.H20@72.44,40.908 ; R21.2@93.758,-4.39 v1(93.758,-3.4) ; R24.2@94.154,17.55 v1(95.144,17.55) ; v1(98.775,32.718) C26.1@99.764,32.718 ; C120.1@99.552,30.686 v1(99.552,31.676) ; v1(99.829,22.558) 99.829,20.97 C118.1@99.89,20.908 ; DD4.2@104.854,0.558 v1(104.854,1.548) ; DD5.2@104.854,10.718 v1(104.854,11.708)
  Signal Layer 2 w0.254: v1(104.854,1.548) 105.42,1.548 107.218,3.346 107.218,10.239 106.822,10.634 106.217,10.634 105.19,11.661 104.902,11.661 v1(104.854,11.708)
  Bottom Layer w0.256: C36.1@58.94,30.408 v1(58.94,31.408) ; C33.1@58.94,40.408 v1(58.94,41.408) ; v1(59.94,28.408) C17.1@60.94,28.408 ; v1(59.94,42.408) C35.1@59.94,43.408 ; C20.1@60.94,35.408 v1(61.94,35.408) ; C27.1@60.94,36.408 v1(61.94,36.408) ; C28.1@61.94,34.408 v1(62.94,34.408) ; v1(61.94,37.408) v1(62.94,36.408) ; C12.1@61.94,38.408 v1(62.94,38.408) ; v1(61.94,39.408) C8.1@61.94,40.408 ; v1(62.94,32.408) C16.1@63.94,32.408 ; v1(62.94,33.408) C11.1@63.94,33.408 ; v1(62.94,37.408) C10.1@63.94,37.408 ; v1(62.94,39.408) C1.1@63.94,38.408 ; C18.1@62.94,40.408 v1(63.94,39.408) ; C9.1@64.94,30.408 v1(64.94,31.408) ; v1(64.94,39.408) C2.1@64.94,40.408 ; C15.1@65.94,28.408 65.5,28.849 65.5,29.591 65.94,30.031 v1(65.94,31.408) ; v1(65.94,39.408) C3.1@65.94,40.408 ; v1(66.94,39.408) C5.1@67.94,39.408 ; C14.1@67.94,30.408 v1(67.94,31.408) ; C29.1@67.94,32.408 v1(68.94,32.408) ; C24.1@67.94,36.408 v1(68.94,36.408) ; C23.1@67.94,37.408 v1(68.94,37.408) v1(68.94,36.408) ; C13.1@68.94,29.408 v1(68.94,30.408) ; v1(68.94,31.408) C32.1@69.94,31.408 ; v1(68.94,33.408) C31.1@69.94,33.408 ; v1(68.94,38.408) C7.1@68.94,39.408 ; v1(69.94,38.408) C19.1@70.94,38.408 ; C34.1@70.94,27.408 v1(70.94,28.408) ; v1(70.94,42.408) C6.1@70.94,43.408 ; v1(71.94,29.416) 72.932,29.416 C22.1@72.94,29.408 ; v1(71.94,41.408) C4.1@71.94,42.408 ; C30.1@72.94,36.408 72.381,35.849 71.758,35.849 71.317,35.408 C21.1@70.94,35.408 v1(69.94,35.408) v1(69.94,36.408) v1(68.94,36.408)
VCC33: C37.1 C38.1 C39.1 C40.1 C41.1 C42.1 C43.1 C44.1 C45.1 C46.1 C47.1 C48.1 C49.1 C50.1 C51.1 C52.1 C53.1 C54.1 C55.1 C56.1 C57.1 C58.1 C59.1 C60.1 C61.1 C62.1 C63.1 C64.1 C65.1 C66.1 C67.1 C68.1 C69.1 C70.1 C71.1 C72.1 C73.1 C74.1 C75.1 C76.1 C77.1 C78.1 C79.1 C80.1 C81.1 C82.1 C83.1 C84.1 C85.1 C86.1 C87.1 C88.1 C89.1 C91.1 C94.1 C96.1 C99.1 C100.1 C101.1 C102.1 C103.1 C104.1 C105.1 C115.1 C119.1 C121.1 C123.1 C128.1 C130.1 C135.1 DA1.3 DD1.A3 DD1.A11 DD1.A16 DD1.A24 DD1.AA22 DD1.AB5 DD1.AB6 DD1.AB9 DD1.AB13 DD1.AB14 DD1.AB17 DD1.AB22 DD1.AD1 DD1.AD20 DD1.AD26 DD1.AF3 DD1.AF11 DD1.AF16 DD1.AF24 DD1.C1 DD1.C20 DD1.C26 DD1.E6 DD1.E9 DD1.E13 DD1.E14 DD1.E17 DD1.F5 DD1.F22 DD1.H9 DD1.H18 DD1.J12 DD1.J15 DD1.J19 DD1.L1 DD1.L26 DD1.M9 DD1.M18 DD1.N5 DD1.N22 DD1.P5 DD1.P22 DD1.R9 DD1.R18 DD1.T1 DD1.T26 DD1.V8 DD1.V12 DD1.V15 DD1.V19 DD1.W9 DD1.W18 DD2.3 DD2.7 DD2.8 DD3.5 DD3.8 DD3.9 DD3.12 DD3.17 DD3.19 DD3.20 DD3.29 DD3.41 DD3.52 DD3.64 DD4.3 DD5.3 DD6.3 DD8.7 DD8.9 DD8.10 DD9.17 DD9.24 DD9.27 R3.2 R5.2 R6.2 R23.2 R32.2 VD1.1 VD2.1 VD3.1 VD4.1 XP1.6 | length 244.6
  Top Layer w0.254: VD2.1@29.368,27.701 v1(30.358,27.701) ; v1(31.757,45.52) 32.709,45.52 VD4.1@32.718,45.529 ; R5.2@32.368,19.621 v1(33.358,19.621) ; R3.2@32.368,22.161 v1(33.358,22.161) ; VD1.1@35.718,27.955 v1(36.708,27.955) ; C135.1@37.04,19.408 v1(38.03,19.408) ; C119.1@40.925,22.111 v1(41.915,22.111) ; C123.1@40.925,24.905 v1(41.915,24.905) ; v1(43.973,40.145) DD2.8@43.973,41.879 ; v1(45.243,40.145) DD2.7@45.243,41.879 ; v1(45.524,28.159) VD3.1@46.513,28.159 ; v1(46.513,34.557) DD2.3@46.513,36.479 ; v1(52.94,25.408) DD1.AD1@53.44,24.908 ; v1(52.94,33.408) DD1.T1@53.44,32.908 ; v1(52.94,38.408) DD1.L1@53.44,37.908 ; v1(52.94,46.408) DD1.C1@53.44,45.908 ; v1(54.94,23.408) DD1.AF3@55.44,22.908 ; v1(54.94,48.408) DD1.A3@55.44,47.908 ; v1(56.94,27.408) DD1.AB5@57.44,26.908 ; v1(56.94,35.408) DD1.P5@57.44,34.908 ; v1(56.94,36.408) DD1.N5@57.44,35.908 ; v1(56.94,43.408) DD1.F5@57.44,42.908 ; v1(57.94,27.408) DD1.AB6@58.44,26.908 ; v1(57.94,44.408) DD1.E6@58.44,43.908 ; v1(59.94,31.408) DD1.V8@60.44,30.908 ; v1(60.94,27.408) DD1.AB9@61.44,26.908 ; v1(60.94,30.408) DD1.W9@61.44,29.908 ; v1(60.94,34.408) DD1.R9@61.44,33.908 ; v1(60.94,37.408) DD1.M9@61.44,36.908 ; v1(60.94,41.408) DD1.H9@61.44,40.908 ; v1(60.94,44.408) DD1.E9@61.44,43.908 ; v1(62.94,48.408) DD1.A11@63.44,47.908 ; v2(63.05,11.056) DD3.64@63.96,11.056 ; v1(63.44,21.908) DD1.AF11@63.44,22.908 ; v1(63.94,31.408) DD1.V12@64.44,30.908 ; v1(63.94,40.408) DD1.J12@64.44,39.908 ; DD3.52@63.96,17.056 v1(64.871,17.056) ; v1(64.94,27.408) DD1.AB13@65.44,26.908 ; v1(64.94,44.408) DD1.E13@65.44,43.908 ; v1(65.94,27.408) DD1.AB14@66.44,26.908 ; v1(65.94,44.408) DD1.E14@66.44,43.908 ; v1(66.66,9.446) DD3.5@66.66,10.356 ; v1(66.94,31.408) DD1.V15@67.44,30.908 ; v1(66.94,40.408) DD1.J15@67.44,39.908 ; v1(67.94,23.408) DD1.AF16@68.44,22.908 ; v1(67.94,48.408) DD1.A16@68.44,47.908 ; DD3.8@68.16,10.356 v1(68.16,11.267) ; DD3.41@68.16,19.256 v1(68.16,20.167) ; DD3.9@68.66,10.356 v1(68.66,11.267) ; v1(68.94,27.408) DD1.AB17@69.44,26.908 ; v1(68.94,44.408) DD1.E17@69.44,43.908 ; v1(69.94,30.408) DD1.W18@70.44,29.908 ; v1(69.94,34.408) DD1.R18@70.44,33.908 ; v1(69.94,37.408) DD1.M18@70.44,36.908 ; v1(69.94,41.408) DD1.H18@70.44,40.908 ; DD3.12@70.16,10.356 v1(70.16,11.267) ; v1(70.94,30.408) DD1.V19@71.44,30.908 ; v1(70.94,40.408) DD1.J19@71.44,39.908 ; v1(71.94,25.408) DD1.AD20@72.44,24.908 ; v1(71.94,46.408) DD1.C20@72.44,45.908 ; DD3.17@72.86,11.056 v1(73.771,11.056) ; DD3.19@72.86,12.056 v1(73.771,12.056) ; DD3.20@72.86,12.556 v1(73.771,12.556) ; DD3.29@72.86,17.056 v1(73.771,17.056) ; v1(73.94,27.408) DD1.AB22@74.44,26.908 ; v1(73.94,28.408) DD1.AA22@74.44,27.908 ; v1(73.94,43.408) DD1.F22@74.44,42.908 ; DD1.P22@74.44,34.908 v1(73.94,35.408) v1(73.94,36.408) DD1.N22@74.44,35.908 ; v1(75.94,23.408) DD1.AF24@76.44,22.908 ; v1(75.94,48.408) DD1.A24@76.44,47.908 ; v1(77.94,25.408) DD1.AD26@78.44,24.908 ; v1(77.94,33.408) DD1.T26@78.44,32.908 ; v1(77.94,38.408) DD1.L26@78.44,37.908 ; v1(77.94,46.408) DD1.C26@78.44,45.908 ; v1(83.048,47.91) R6.2@84.36,47.91 ; v1(86.9,37.23) 88.428,37.23 DD9.24@88.458,37.26 ; v1(86.9,39.17) 86.94,39.21 DD9.27@88.458,39.21 ; v1(87.154,32.718) 88.45,32.718 DD9.17@88.458,32.71 ; R23.2@94.154,12.47 v1(95.144,12.47) ; C115.1@98.582,6.414 v1(98.582,7.404) ; DD4.3@104.854,2.858 v1(104.854,3.848) ; DD5.3@104.854,13.018 v1(104.854,14.008) ; DA1.3@105.878,42.086 105.899,42.066 v1(107.271,42.066) ; R32.2@109.386,35.258 v1(110.376,35.258) ; v1(110.421,9.02) 110.421,7.452 C121.1@110.442,7.43 ; v1(114.045,-13.129) DD6.3@115.221,-13.129 ; v1(115.602,-14.262) DD6.3@115.602,-13.086 ; v1(115.602,-11.909) DD6.3@115.602,-13.086 ; DD6.3@115.642,-13.126 DD6.3@115.602,-13.086 ; DD6.3@116.11,-13.129 v1(117.287,-13.129)
  Signal Layer 2 w0.254: v1(86.9,39.17) v1(86.9,37.23) 86.9,32.99 87.154,32.736 v1(87.154,32.718)
  Bottom Layer w0.254: v1(86.9,37.23) 87.605,37.23 88.002,37.628 C100.1@88.002,38.309
  Bottom Layer w0.256: C94.1@43.973,39.129 v1(43.973,40.145) ; C96.1@45.243,39.129 v1(45.243,40.145) ; v1(46.513,34.557) 47.021,34.049 C91.1@47.783,34.049 ; v1(52.94,25.408) C50.1@52.94,26.408 ; v1(52.94,33.408) C57.1@52.94,34.408 ; v1(52.94,38.408) C56.1@52.94,39.408 ; v1(52.94,46.408) C68.1@53.94,46.408 ; v1(54.94,23.408) C48.1@54.94,24.408 ; v1(54.94,48.408) C66.1@55.94,48.408 ; C85.1@55.94,43.408 v1(56.94,43.408) ; C49.1@56.94,26.408 v1(56.94,27.408) ; C38.1@56.94,34.408 v1(56.94,35.408) ; v1(56.94,36.408) C37.1@56.94,37.408 ; C44.1@57.94,26.408 v1(57.94,27.408) ; v1(57.94,44.408) C69.1@57.94,45.408 ; v1(59.94,31.408) C39.1@59.94,32.408 ; C75.1@59.94,37.408 v1(60.94,37.408) ; C42.1@60.94,26.408 v1(60.94,27.408) ; v1(60.94,30.408) C43.1@60.94,31.408 ; C80.1@60.94,33.408 v1(60.94,34.408) ; v1(60.94,41.408) C87.1@60.94,42.408 ; v1(60.94,44.408) C86.1@60.94,45.408 ; C104.1@62.262,11.89 62.77,11.89 63.05,11.611 v2(63.05,11.056) ; C46.1@62.44,21.908 v1(63.44,21.908) ; C52.1@62.94,47.408 v1(62.94,48.408) ; C72.1@63.94,30.408 v1(63.94,31.408) ; v1(63.94,40.408) C89.1@63.94,41.408 ; v1(64.871,17.056) 64.888,17.056 C105.1@65.564,17.732 ; C45.1@64.94,26.408 v1(64.94,27.408) ; v1(64.94,44.408) C67.1@64.94,45.408 ; C51.1@65.94,26.408 v1(65.94,27.408) ; v1(65.94,44.408) C71.1@65.94,45.408 ; v1(66.66,9.446) 66.66,8.762 66.834,8.588 C103.1@67.596,8.588 ; C77.1@66.94,28.408 66.453,28.895 66.453,29.921 66.94,30.408 v1(66.94,31.408) ; v1(66.94,40.408) C73.1@66.94,41.408 ; v1(67.94,23.408) C60.1@67.94,24.358 ; C79.1@67.94,47.408 v1(67.94,48.408) ; v1(68.16,20.167) 68.668,20.675 C74.1@69.269,20.675 ; C59.1@68.94,26.408 v1(68.94,27.408) ; v1(68.94,44.408) C65.1@68.94,45.408 ; C84.1@69.94,29.408 v1(69.94,30.408) ; v1(69.94,34.408) 70.96,34.408 71.94,33.428 C88.1@71.94,33.408 ; v1(69.94,37.408) C83.1@70.94,37.408 71.481,37.949 71.481,38.989 71.94,39.449 C81.1@71.94,40.408 v1(70.94,40.408) ; v1(69.94,41.408) C76.1@69.94,42.408 ; v1(70.16,11.267) 70.16,11.66 70.39,11.89 C130.1@70.898,11.89 ; C47.1@71.94,24.408 v1(71.94,25.408) ; C82.1@71.94,30.408 v1(70.94,30.408) 70.5,30.849 70.5,31.948 71.94,33.389 C88.1@71.94,33.408 ; C62.1@71.94,45.408 v1(71.94,46.408) ; v1(73.771,11.056) 73.771,10.542 73.946,10.366 C102.1@74.708,10.366 ; v1(73.771,17.056) 74.114,17.056 74.454,16.716 C128.1@74.454,16.208 C128.1@74.454,15.954 ; C58.1@73.94,26.408 v1(73.94,27.408) ; v1(73.94,28.408) C40.1@74.94,28.408 ; v1(73.94,35.408) C54.1@73.94,34.408 ; v1(73.94,36.408) C63.1@73.94,37.408 C63.1@73.94,37.449 ; C64.1@73.94,42.408 v1(73.94,43.408) 75.448,43.408 ; v1(75.94,23.408) C41.1@75.94,24.408 ; C70.1@75.94,47.408 v1(75.94,48.408) ; v1(77.94,25.408) C55.1@77.94,26.408 78.94,26.408 83.44,30.908 85.44,30.908 86.138,31.606 C101.1@86.138,32.718 v1(87.154,32.718) ; C78.1@77.94,32.408 v1(77.94,33.408) 75.563,33.408 75.123,33.849 74.5,33.849 C54.1@73.94,34.408 ; v1(77.94,38.408) C61.1@77.94,39.408 76.705,39.408 76.029,40.084 76.029,42.828 75.448,43.408 ; v1(77.94,46.408) C53.1@77.94,45.408 ; v1(83.048,47.91) 80.942,47.91 79.905,46.873 79.905,45.408 ; C99.1@86.9,38.306 v1(86.9,39.17) 86.143,39.17 79.905,45.408 ; v1(104.854,14.008) 104.854,20.822 108.44,24.408 108.44,33.323 v1(110.376,35.258) 110.376,38.961 v1(107.271,42.066) ; C88.1@71.94,33.408 72.431,33.899 73.431,33.899 C54.1@73.94,34.408 ; 75.448,43.408 77.406,45.366 77.898,45.366 C53.1@77.94,45.408 ; C53.1@77.94,45.408 79.905,45.408
pads on no net: C129.1 DA1.6 DD1.A4 DD1.A5 DD1.A6 DD1.A7 DD1.A8 DD1.A9 DD1.A10 DD1.A13 DD1.A14 DD1.A17 DD1.A18 DD1.A19 DD1.A20 DD1.A21 DD1.A22 DD1.A23 DD1.AA1 DD1.AA2 DD1.AA3 DD1.AA4 DD1.AA5 DD1.AA6 DD1.AA7 DD1.AA9 DD1.AA10 DD1.AA11 DD1.AA12 DD1.AA13 DD1.AA14 DD1.AA15 DD1.AA16 DD1.AA17 DD1.AA18 DD1.AA20 DD1.AA23 DD1.AA24 DD1.AA25 DD1.AB1 DD1.AB2 DD1.AB3 DD1.AB4 DD1.AB8 DD1.AB10 DD1.AB12 DD1.AB15 DD1.AB18 DD1.AB20 DD1.AB21 DD1.AB23 DD1.AB24 DD1.AB25 DD1.AC1 DD1.AC2 DD1.AC3 DD1.AC5 DD1.AC6 DD1.AC7 DD1.AC8 DD1.AC9 DD1.AC10 DD1.AC11 DD1.AC12 DD1.AC13 DD1.AC14 DD1.AC15 DD1.AC16 DD1.AC17 DD1.AC18 DD1.AC19 DD1.AC20 DD1.AC21 DD1.AC22 DD1.AC23 DD1.AC24 DD1.AC25 DD1.AD2 DD1.AD3 DD1.AD4 DD1.AD5 DD1.AD6 DD1.AD7 DD1.AD8 DD1.AD10 DD1.AD11 DD1.AD12 DD1.AD13 DD1.AD15 DD1.AD16 DD1.AD17 DD1.AD19 DD1.AD21 DD1.AD22 DD1.AD23 DD1.AD24 DD1.AD25 DD1.AE2 DD1.AE3 DD1.AE4 DD1.AE5 DD1.AE6 DD1.AE7 DD1.AE8 DD1.AE15 DD1.AE16 DD1.AE18 DD1.AF4 DD1.AF5 DD1.AF6 DD1.AF8 DD1.AF18 DD1.B2 DD1.B3 DD1.B4 DD1.B5 DD1.B6 DD1.B7 DD1.B8 DD1.B9 DD1.B10 DD1.B11 DD1.B12 DD1.B13 DD1.B14 DD1.B15 DD1.B16 DD1.B17 DD1.B18 DD1.B19 DD1.B20 DD1.B21 DD1.B22 DD1.B23 DD1.B24 DD1.B25 DD1.C2 DD1.C3 DD1.C4 DD1.C5 DD1.C6 DD1.C7 DD1.C8 DD1.C9 DD1.C10 DD1.C11 DD1.C12 DD1.C13 DD1.C15 DD1.C16 DD1.C17 DD1.C19 DD1.C21 DD1.C22 DD1.C23 DD1.C24 DD1.C25 DD1.D2 DD1.D5 DD1.D6 DD1.D7 DD1.D8 DD1.D9 DD1.D10 DD1.D11 DD1.D12 DD1.D13 DD1.D14 DD1.D15 DD1.D16 DD1.D17 DD1.D18 DD1.D19 DD1.D20 DD1.D21 DD1.D22 DD1.D23 DD1.D25 DD1.E2 DD1.E5 DD1.E8 DD1.E10 DD1.E12 DD1.E15 DD1.E18 DD1.E20 DD1.E22 DD1.E23 DD1.E24 DD1.E25 DD1.F1 DD1.F2 DD1.F3 DD1.F4 DD1.F6 DD1.F7 DD1.F9 DD1.F10 DD1.F11 DD1.F12 DD1.F13 DD1.F14 DD1.F15 DD1.F16 DD1.F17 DD1.F18 DD1.F20 DD1.F21 DD1.F23 DD1.F24 DD1.F25 DD1.G1 DD1.G2 DD1.G3 DD1.G4 DD1.G5 DD1.G6 DD1.G9 DD1.G10 DD1.G11 DD1.G12 DD1.G13 DD1.G14 DD1.G15 DD1.G16 DD1.G17 DD1.G18 DD1.G21 DD1.G22 DD1.G23 DD1.G24 DD1.G25 DD1.H1 DD1.H2 DD1.H3 DD1.H4 DD1.H6 DD1.H8 DD1.H10 DD1.H11 DD1.H12 DD1.H15 DD1.H16 DD1.H17 DD1.H19 DD1.H21 DD1.H23 DD1.H24 DD1.H25 DD1.J1 DD1.J2 DD1.J3 DD1.J4 DD1.J5 DD1.J6 DD1.J7 DD1.J8 DD1.J9 DD1.J10 DD1.J11 DD1.J13 DD1.J14 DD1.J16 DD1.J17 DD1.J18 DD1.J20 DD1.J21 DD1.J22 DD1.J23 DD1.J24 DD1.J25 DD1.K1 DD1.K2 DD1.K3 DD1.K4 DD1.K5 DD1.K6 DD1.K7 DD1.K8 DD1.K9 DD1.K16 DD1.K17 DD1.K18 DD1.K19 DD1.K21 DD1.K22 DD1.K23 DD1.K24 DD1.K25 DD1.L2 DD1.L3 DD1.L4 DD1.L6 DD1.L7 DD1.L8 DD1.L9 DD1.L10 DD1.L19 DD1.L20 DD1.L21 DD1.L23 DD1.L24 DD1.L25 DD1.M2 DD1.M3 DD1.M4 DD1.M5 DD1.M6 DD1.M7 DD1.M8 DD1.M19 DD1.M20 DD1.M21 DD1.M22 DD1.M23 DD1.M24 DD1.M25 DD1.N1 DD1.N2 DD1.N9 DD1.N18 DD1.N20 DD1.N21 DD1.N23 DD1.N24 DD1.N25 DD1.P1 DD1.P2 DD1.P3 DD1.P4 DD1.P6 DD1.P7 DD1.P9 DD1.P17 DD1.P18 DD1.P23 DD1.P24 DD1.P25 DD1.R2 DD1.R3 DD1.R4 DD1.R5 DD1.R6 DD1.R7 DD1.R8 DD1.R17 DD1.R19 DD1.R20 DD1.R24 DD1.R25 DD1.T2 DD1.T3 DD1.T4 DD1.T6 DD1.T7 DD1.T8 DD1.T9 DD1.T10 DD1.T17 DD1.T18 DD1.T19 DD1.T20 DD1.T21 DD1.T22 DD1.T23 DD1.T24 DD1.T25 DD1.U1 DD1.U2 DD1.U3 DD1.U4 DD1.U5 DD1.U6 DD1.U7 DD1.U9 DD1.U10 DD1.U12 DD1.U17 DD1.U18 DD1.U20 DD1.U21 DD1.U22 DD1.U23 DD1.U24 DD1.U25 DD1.V1 DD1.V2 DD1.V3 DD1.V4 DD1.V5 DD1.V6 DD1.V9 DD1.V10 DD1.V11 DD1.V13 DD1.V14 DD1.V17 DD1.V18 DD1.V20 DD1.V21 DD1.V22 DD1.V23 DD1.V24 DD1.V25 DD1.W1 DD1.W2 DD1.W3 DD1.W4 DD1.W6 DD1.W8 DD1.W10 DD1.W11 DD1.W12 DD1.W15 DD1.W16 DD1.W17 DD1.W19 DD1.W21 DD1.W23 DD1.W24 DD1.W25 DD1.Y1 DD1.Y2 DD1.Y3 DD1.Y4 DD1.Y5 DD1.Y7 DD1.Y10 DD1.Y11 DD1.Y12 DD1.Y13 DD1.Y14 DD1.Y15 DD1.Y16 DD1.Y18 DD1.Y21 DD1.Y22 DD1.Y23 DD1.Y24 DD1.Y25 DD3.23 DD3.24 DD3.42 DD3.43 DD4.4 DD5.4 DD7.5 DD7.9 DD7.10 DD7.11 DD7.12 DD7.13 DD7.14 DD8.4 DD9.23 DD9.25 L1.3 L2.3
copper on no net: | length 8.8
  Top Layer w0.254: 88.458,36.61 95.364,36.61 95.75,36.996 95.75,38.306

## Polygon pours and split planes (outlines as drawn)
VCC12 on Signal Layer 2 "VCC12_L03_P038" (solid, pour order 38): 60.44,41.408 ccw(c61.94,41.408) 61.94,39.908 70.94,39.908 ccw(c70.94,40.408) 71.44,40.408 ccw(c70.94,40.408) 70.94,40.908 cw(c70.94,41.408) 70.44,41.408 70.44,42.408 cw(c70.94,42.408) 70.94,42.908 76.9,42.908 ccw(c76.9,45.448) 79.44,45.448 79.44,51.368 cw(c81.98,51.368) 81.98,53.908 117.9,53.908 cw(c117.9,51.368) 120.44,51.368 120.44,49.448 ccw(c122.98,49.448) 122.98,46.908 124.9,46.908 cw(c124.9,44.368) 127.44,44.368 127.44,-18.552 cw(c124.9,-18.552) 124.9,-21.092 122.98,-21.092 ccw(c122.98,-23.632) 120.44,-23.632 120.44,-25.552 cw(c117.9,-25.552) 117.9,-28.092 80.98,-28.092 cw(c80.98,-25.552) 78.44,-25.552 78.44,25.909 ccw(c77.941,25.909) 77.941,26.408 74.94,26.408 cw(c74.94,26.908) 74.44,26.908 74.44,29.416 ccw(c73.948,29.416) 73.948,29.908 72.94,29.908 ccw(c72.94,29.408) 72.44,29.408 72.44,28.408 cw(c71.94,28.408) 71.94,27.908 70.94,27.908 cw(c70.94,28.408) 70.44,28.408 70.44,28.908 cw(c70.94,28.908) 70.94,29.408 ccw(c70.94,29.908) 71.44,29.908 71.44,30.408 ccw(c70.94,30.408) 70.94,30.908 69.94,30.908 ccw(c69.94,30.408) 69.44,30.408 cw(c68.94,30.408) 68.94,29.908 67.94,29.908 cw(c67.94,30.408) 67.44,30.408 67.44,31.408 ccw(c66.94,31.408) 66.94,31.908 ccw(c66.94,31.408) 66.44,31.408 cw(c65.94,31.408) 65.94,30.908 64.94,30.908 cw(c64.94,31.408) 64.44,31.408 ccw(c63.94,31.408) 63.94,31.908 61.94,31.908 59.896,31.908 ccw(c59.896,31.457) 59.445,31.457 59.445,31.413 cw(c58.94,31.413) 58.94,30.908 cw(c58.94,31.408) 58.44,31.408 58.44,33.408 cw(c58.94,33.408) 58.94,33.908 60.94,33.908 ccw(c60.94,34.408) 61.44,34.408 61.44,37.408 ccw(c60.94,37.408) 60.94,37.908 ccw(c60.94,37.408) 60.44,37.408 60.44,36.908 cw(c59.94,36.908) 59.94,36.408 58.94,36.408 cw(c58.94,36.908) 58.44,36.908 58.44,41.408 cw(c58.94,41.408) 58.94,41.908 ccw(c58.94,42.408) 59.44,42.408 cw(c59.927,42.408) 59.927,42.895 60.057,42.895 cw(c59.94,42.408) 60.44,42.408
VCC33 on Signal Layer 2 "Signal Layer 2-No Net" (solid, pour order 36): 80.063,13.408 cw(c80.384,15.605) 78.187,15.926 78.187,12.943 78.409,12.943 cw(c78.409,12.912) 78.44,12.912 78.44,-25.552 ccw(c80.98,-25.552) 80.98,-28.092 117.94,-28.092 ccw(c117.94,-25.592) 120.44,-25.592 120.44,-23.632 cw(c122.98,-23.632) 122.98,-21.092 125.067,-21.092 ccw(c125.067,-18.718) 127.44,-18.718 127.44,10.868 ccw(c124.9,10.868) 124.9,13.408 105.749,13.408 cw(c105.749,13.934) 105.224,13.934 105.224,14.023 ccw(c104.854,14.023) 104.854,14.392 ccw(c104.854,13.978) 104.44,13.978 104.44,13.908 cw(c103.94,13.908) 103.94,13.408
VCC33 on Signal Layer 2 "Signal Layer 2-No Net 1" (solid, pour order 52): 73.44,-21.092 73.9,-21.092 cw(c73.9,-23.632) 76.44,-23.632 76.44,-25.842 ccw(c78.69,-25.842) 78.69,-28.092 80.73,-28.092 ccw(c80.73,-27.381) 81.44,-27.381 81.44,-20.592 ccw(c78.94,-20.592) 78.94,-18.092 75.98,-18.092 ccw(c75.98,-20.632) 73.44,-20.632
VCC33 on Signal Layer 2 "VCC33_L03_P024" (solid, pour order 46): 67.904,-28.092 ccw(c67.904,-25.552) 70.444,-25.552 70.444,-23.621 cw(c72.984,-23.621) 72.984,-21.081 74.428,-21.092 75.9,-21.092 ccw(c75.9,-18.552) 78.44,-18.552 78.44,25.908 ccw(c77.94,25.908) 77.94,26.408 74.94,26.408 cw(c74.94,26.908) 74.44,26.908 74.44,29.408 ccw(c73.932,29.408) 73.932,29.916 71.932,29.916 cw(c71.932,30.408) 71.44,30.408 ccw(c70.94,30.408) 70.94,30.908 69.94,30.908 ccw(c69.94,30.408) 69.44,30.408 cw(c68.94,30.408) 68.94,29.908 67.94,29.908 cw(c67.94,30.408) 67.44,30.408 67.44,31.408 ccw(c66.94,31.408) 66.94,31.908 ccw(c66.94,31.408) 66.44,31.408 cw(c65.94,31.408) 65.94,30.908 64.94,30.908 cw(c64.94,31.408) 64.44,31.408 ccw(c63.94,31.408) 63.94,31.908 61.94,31.908 cw(c61.94,32.408) 61.44,32.408 61.44,37.408 ccw(c60.94,37.408) 60.94,37.908 ccw(c60.94,37.408) 60.44,37.408 60.44,36.908 cw(c59.94,36.908) 59.94,36.408 57.94,36.408 cw(c57.94,36.908) 57.44,36.908 57.44,37.408 cw(c57.94,37.408) 57.94,37.908 ccw(c57.94,38.408) 58.44,38.408 58.44,42.408 cw(c58.94,42.408) 58.94,42.908 59.94,42.908 cw(c59.94,42.408) 60.44,42.408 60.44,41.408 ccw(c61.94,41.408) 61.94,39.908 68.94,39.908 70.94,39.908 ccw(c70.94,40.408) 71.44,40.408 ccw(c70.94,40.408) 70.94,40.908 cw(c70.94,41.408) 70.44,41.408 70.44,42.408 cw(c70.94,42.408) 70.94,42.908 76.9,42.908 ccw(c76.9,45.448) 79.44,45.448 79.44,51.368 ccw(c76.9,51.368) 76.9,53.908 30.98,53.908 ccw(c30.98,51.368) 28.44,51.368 28.44,49.448 cw(c25.9,49.448) 25.9,46.908 23.98,46.908 ccw(c23.98,44.368) 21.44,44.368 21.44,-18.552 ccw(c23.98,-18.552) 23.98,-21.092 25.9,-21.092 cw(c25.9,-23.632) 28.44,-23.632 28.44,-25.552 ccw(c30.98,-25.552) 30.98,-28.092
VCC12 on Signal Layer 2 "Signal Layer 2-No Net" (solid, pour order 30): 105.94,10.908 105.94,3.408 cw(c104.94,3.408) 104.94,2.408 ccw(c104.94,1.408) 103.94,1.408 103.94,0.448 cw(c101.4,0.448) 101.4,-2.092 93.94,-2.092 ccw(c93.94,-3.092) 92.94,-3.092 92.94,-3.592 ccw(c93.94,-3.592) 93.94,-4.592 106.94,-4.592 ccw(c106.94,-2.592) 108.94,-2.592 108.94,13.908 106.94,13.908 106.94,11.908 cw(c105.94,11.908)
VCC12 on Signal Layer 2 "Signal Layer 2-No Net" (solid, pour order 24): 59.94,28.908 cw(c59.94,28.408) 60.44,28.408 cw(c59.94,28.408) 59.94,27.908 58.44,27.908 cw(c58.44,28.908) 57.44,28.908 57.44,32.908 cw(c58.44,32.908) 58.44,33.908 58.94,33.908 cw(c58.94,32.86) 59.989,32.86 59.989,31.913 59.901,31.913 ccw(c59.901,31.457) 59.445,31.457 59.445,29.404 ccw(c59.94,29.404)
GND on Bottom Layer "GND_L04_P028" (solid, pour order 48): 67.923,-28.092 ccw(c67.923,-25.552) 70.463,-25.552 70.463,-23.632 cw(c73.003,-23.632) 73.003,-21.092 73.9,-21.092 cw(c73.9,-23.632) 76.44,-23.632 76.44,-25.552 ccw(c78.98,-25.552) 78.98,-28.092 117.9,-28.092 ccw(c117.9,-25.552) 120.44,-25.552 120.44,-23.632 cw(c122.98,-23.632) 122.98,-21.092 124.9,-21.092 ccw(c124.9,-18.552) 127.44,-18.552 127.44,44.368 ccw(c124.9,44.368) 124.9,46.908 122.98,46.908 cw(c122.98,49.448) 120.44,49.448 120.44,51.368 ccw(c117.9,51.368) 117.9,53.908 30.98,53.908 ccw(c30.98,51.368) 28.44,51.368 28.44,49.448 cw(c25.9,49.448) 25.9,46.908 23.98,46.908 ccw(c23.98,44.368) 21.44,44.368 21.44,-18.552 ccw(c23.98,-18.552) 23.98,-21.092 25.9,-21.092 cw(c25.9,-23.632) 28.44,-23.632 28.44,-25.092 ccw(c31.44,-25.092) 31.44,-28.092

## Other copper
Signal Layer 2:
  pour cut-out: 74.428,-21.092 74.922,-21.092 cw(c74.922,-23.632) 77.462,-23.632 77.462,-25.552 ccw(c80.002,-25.552) 80.002,-28.092 78.69,-28.092 cw(c78.69,-25.842) 76.44,-25.842 76.44,-23.626 ccw(c73.9,-23.626) 73.9,-21.086 74.428,-21.086
  pour cut-out: 78.183,15.506 78.183,15.287 ccw(c80.063,15.287) 80.063,13.408 ccw(c80.063,13.433) 80.087,13.433 80.087,13.663 cw(c80.087,15.243) 78.508,15.243 78.508,15.351 78.442,22.754
  pour cut-out: 125.156,13.663 125.622,13.663 ccw(c125.622,15.487) 127.445,15.487 127.445,12.326 127.352,12.326 ccw(c127.352,12.288) 127.313,12.288
  pour cut-out: 58.186,41.408 58.186,43.31 cw(c58.92,43.31) 58.92,44.044 61.014,44.044 cw(c61.014,43.418) 61.64,43.418 61.64,43.15 cw(c61.029,43.15) 61.029,42.539 ccw(c61.029,42.218) 60.709,42.218 60.709,41.853 ccw(c60.591,41.853) 60.591,41.97 cw(c60.591,42.121) 60.44,42.121 60.44,42.408 ccw(c59.954,42.408) 59.954,42.895 59.903,42.895 ccw(c59.903,42.432) 59.44,42.432 59.44,42.384 cw(c58.964,42.384) 58.964,41.908 58.916,41.908 ccw(c58.916,41.433) 58.44,41.433 cw(c58.416,41.433) 58.416,41.408
  pour cut-out: 58.94,36.154 58.154,36.154 cw(c58.154,36.866) 57.442,36.866 cw(c57.461,36.866) 57.461,36.885 57.899,36.885 cw(c57.93,36.642) 58.173,36.674
  pour cut-out: 72.695,28.649 72.695,28.469 cw(c71.88,28.469) 71.88,27.654 71.88,27.908 cw(c72.027,27.908) 72.027,28.055 72.294,28.055 ccw(c72.294,28.201) 72.44,28.201 72.44,28.649
  pour cut-out: 98.594,-4.607 100.143,-4.607 100.143,-4.608 100.145,-4.853 98.602,-4.853

## Silkscreen, mask and mechanical layers (free items; w line width, h text height)
Top Overlay:
  circle w0: c24.44,50.908 r3.5
  circle w0: c124.44,50.908 r3.5
  circle w0: c124.44,-25.092 r3.5
  circle w0: c24.44,-25.092 r3.5
  circle w0: c74.488,-25.134 r3.5
Mechanical 13:
  lines w0.1: 19.44,-30.092 19.44,-27.092 19.44,55.908 129.44,55.908 129.44,57.908 129.44,-28.092

## Text inside footprints (layer, text, board x,y; h text height)
XP4: Top Overlay "EDGE PCB" at 100.572,-27.272 h0.2